# EAGLE board SHTC3 Breakout-MiddleJig (EAGLE 9.1.3)
REVISION: A

Size 38.1 x 38.1 mm. Coordinates in mm from the lower left corner, seen from the top.
Outline: 0,35.56 arc-80 2.54,38.1 35.56,38.1 arc-80 38.1,35.56 38.1,2.54 arc-80 35.56,0 2.54,0 arc-80 0,2.54 0,35.56
Copper layers (1*16): Top 0.035mm / dielectric 1.5mm / Bottom 0.035mm
Design rules "SparkFun-2-layer-PCBWay-LIMIT": minimum track width 6mil, minimum drill 0.3mm, track to track 6mil, track to pad 6mil, pad to pad 6mil, via to via 6mil, smd to smd 6mil, copper to edge 6mil, drill to drill 6mil, minimum pad ring 6mil, minimum via ring 6mil, stop-mask expansion 4mil, vias tented up to drill 25mil, thermal gap 10mil
Net classes: 1 power: width 0.203 mm
Holes 1.78 mm at 15.24,7.62 17.78,7.62 20.32,7.62 22.86,7.62
tRestrict: 3 lines
bRestrict: 3 lines
Milling: 3 lines

## Footprints (pad centres in the part's own frame; a part is rotated, then mirrored left to right if it is on the bottom)
STAND-OFF-TIGHT = hole 3.048: 0,0
NUBBIN_LOCKER = hole 2.794: 0,0

## Placement (x,y rotation side)
E$1  [STAND-OFF-TIGHT]  3.17,6.35 0 top
E$2  [STAND-OFF-TIGHT]  3.17,31.75 0 top
E$3  [STAND-OFF-TIGHT]  34.92,6.35 0 top
E$4  [STAND-OFF-TIGHT]  34.92,31.75 0 top
E$5  [NUBBIN_LOCKER]  19.05,3.17 0 top
E$6  [NUBBIN_LOCKER]  19.05,34.92 0 top
FRAME1  FRAME-LETTER  [CREATIVE_COMMONS]  50.8,-12.7 0 top  (outside the outline)
LOGO1  OSHW-LOGOMINI  [OSHW-LOGO-MINI]  8.89,10.16 0 bottom
U$1  SPARKX-LOGO4  [SPARKX-MEDIUM]  19.05,29.84 0 top
U$2  SPARKX-LOGO4  [SPARKX-MEDIUM]  19.05,29.84 0 bottom
U$3  [GND1]  15.24,7.87 90 bottom
U$4  [3#3V2]  17.78,7.87 90 bottom
U$5  [SDA8]  20.32,7.87 90 bottom
U$6  [SCL9]  22.86,7.87 90 bottom
U$7  [SHTC3_HUMIDITY1]  25.4,27.69 0 bottom
U$8  [SHTC3_HUMIDITY1]  12.7,27.69 0 top
U$9  [I_SUPER2_C-()-03]  16.56,25.93 270 bottom
U$10  [(PWR)]  6.98,14.1 0 top
U$21  [3#3V2]  17.78,7.87 90 top
U$22  [GND1]  15.24,7.87 90 top
U$26  [SCL9]  22.86,7.87 90 top
U$27  [SDA8]  20.32,7.87 90 top
U$29  [QWIIC-LOGO-MEDIUM]  27.94,10.67 0 bottom

## Library data of the parts
E$1-E$6 = SparkFun-Hardware
FRAME1 LOGO1 = SparkFun-Aesthetics
U$1 U$2 = SparkX
U$3-U$6 U$10 U$21 U$22 U$26 U$27 = Labels-0_04
U$7 U$8 = buzzard_labels
U$9 U$29 = Labels

## Text on the board
Top: GPS-RTK
Bottom: 596
tPlace: #596 | GPS-RTK | DEV-14566
Measures: Dimensions in inches
tDocu: Bryan Hoff